# EAGLE board selector_wheel_second_try (EAGLE 7.3.0)
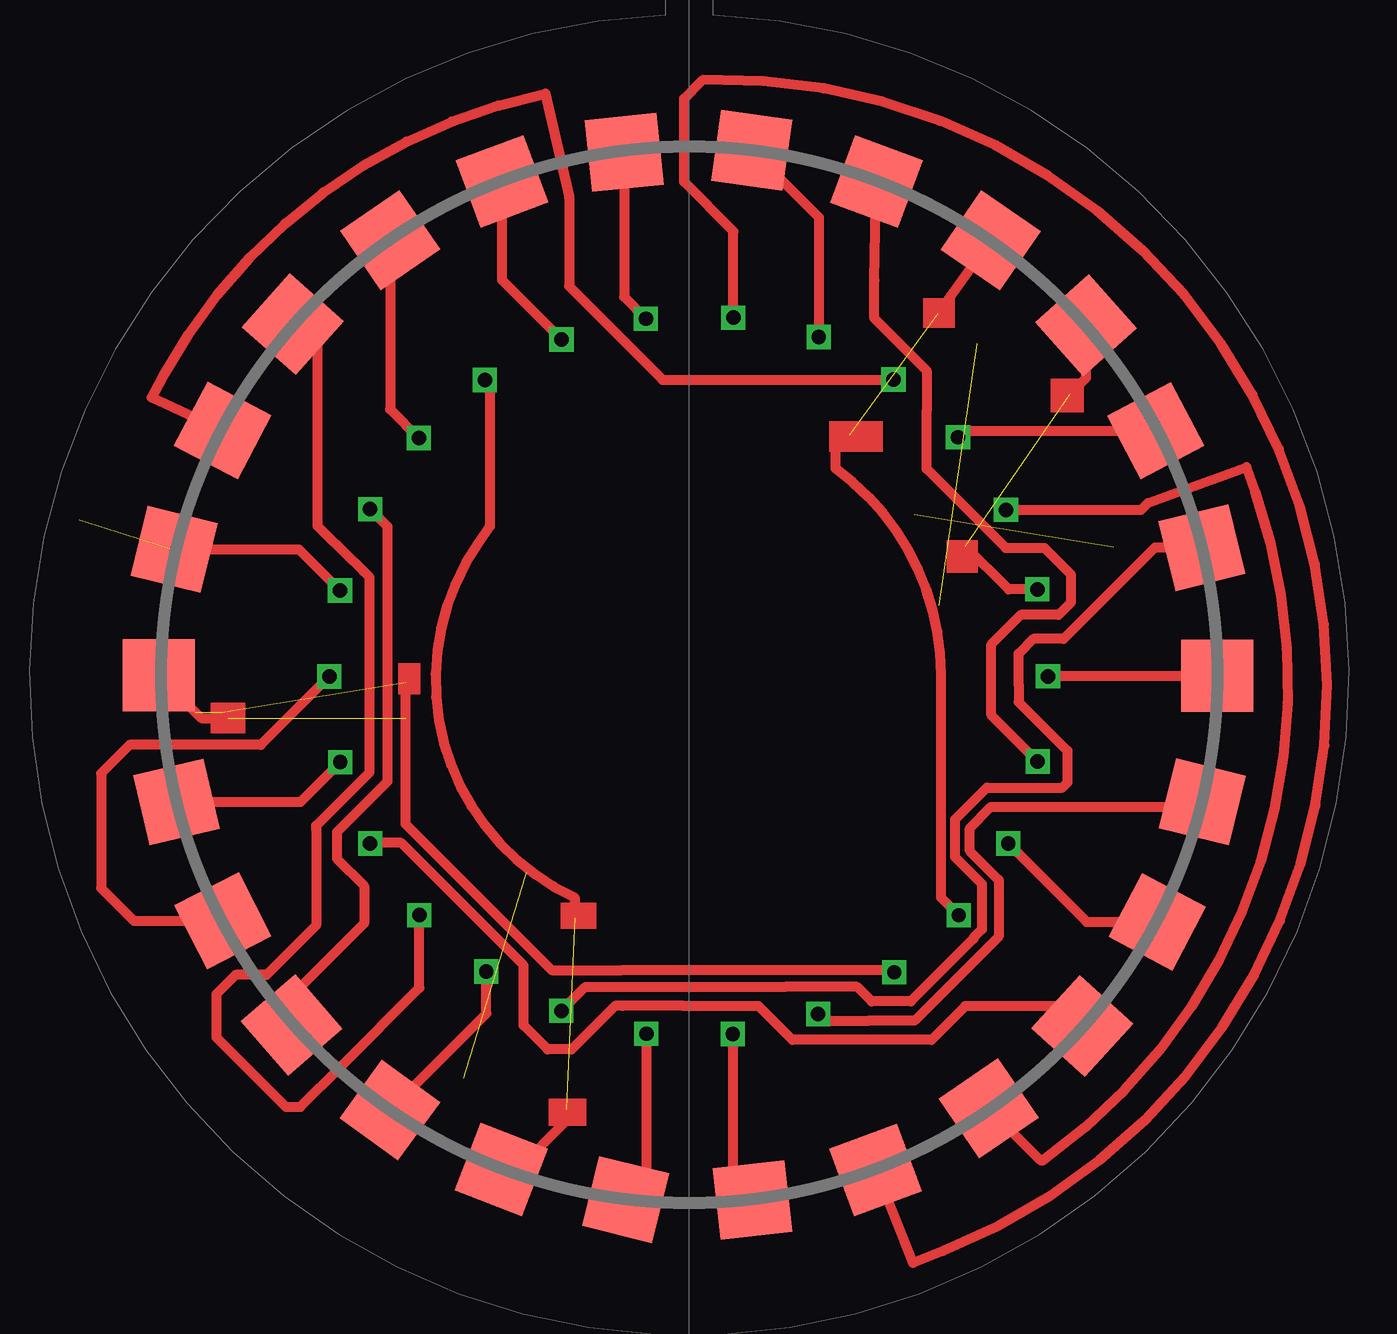
[diagram p0: board, top side]
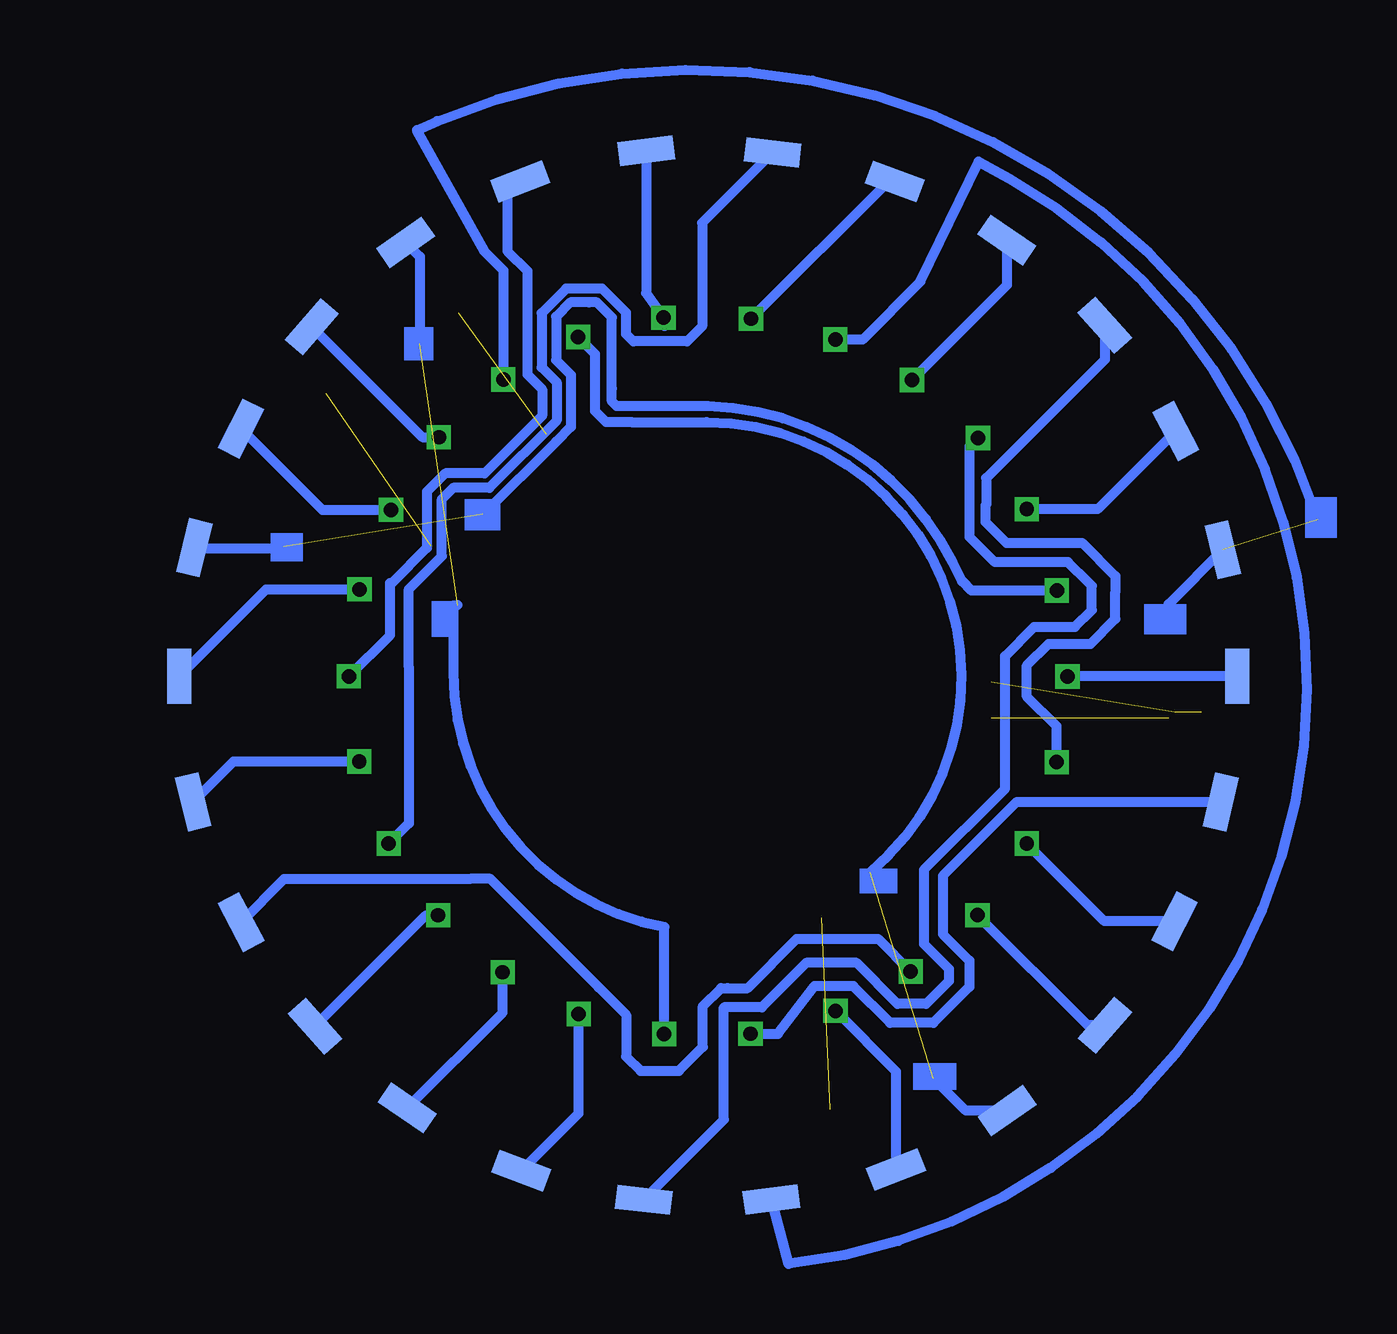
[diagram p1: board, bottom side, seen from below]

No outline drawn. Coordinates in mm, seen from the top.
Copper layers (1*16): Top 0.035mm / dielectric 1.5mm / Bottom 0.035mm
Design rules "default": minimum track width 10mil, minimum drill 24mil, track to track 8mil, track to pad 8mil, pad to pad 8mil, via to via 8mil, smd to smd 8mil, copper to edge 40mil, drill to drill 8mil, minimum pad ring 10mil, minimum via ring 8mil, stop-mask expansion 4mil, vias tented up to drill 0mil, thermal gap 10mil

## Footprints (pad centres in the part's own frame; a part is rotated, then mirrored left to right if it is on the bottom)
CONTACT = smd 3 x 3: P$1 0,0
SPRING = smd 2.3 x 1: P$1 0,0

## Placement (x,y rotation side)
U$1  CONTACT  [CONTACT]  52.01,29.97 0 top
U$2  CONTACT  [CONTACT]  51.36,35.31 103.9 top
U$3  CONTACT  [CONTACT]  49.44,40.18 117.8 top
U$4  CONTACT  [CONTACT]  46.53,44.57 41.7 top
U$5  CONTACT  [CONTACT]  42.56,48.11 145.6 top
U$6  CONTACT  [CONTACT]  37.8,50.56 69.5 top
U$7  CONTACT  [CONTACT]  7.89,29.98 0 top
U$8  CONTACT  [CONTACT]  27.29,51.77 95.9 top
U$9  CONTACT  [CONTACT]  49.51,19.71 332.2 top
U$10  CONTACT  [CONTACT]  51.38,24.71 346.1 top
U$11  CONTACT  [CONTACT]  46.38,15.37 137.6 top
U$12  CONTACT  [CONTACT]  42.48,11.95 304.4 top
U$13  CONTACT  [CONTACT]  32.64,8.13 276.6 top
U$14  CONTACT  [CONTACT]  37.77,9.38 290.5 top
U$15  CONTACT  [CONTACT]  22.17,9.39 248.8 top
U$16  CONTACT  [CONTACT]  27.36,8.14 346.1 top
U$17  CONTACT  [CONTACT]  13.44,15.42 221 top
U$18  CONTACT  [CONTACT]  17.53,11.87 54.2 top
U$19  CONTACT  [CONTACT]  17.54,48.12 304.4 top
U$20  CONTACT  [CONTACT]  22.2,50.57 290.5 top
U$21  CONTACT  [CONTACT]  13.48,44.62 318.3 top
U$22  CONTACT  [CONTACT]  10.56,40.19 332.2 top
U$23  CONTACT  [CONTACT]  8.63,24.71 193.2 top
U$24  CONTACT  [CONTACT]  8.54,35.23 346.1 top
U$25  CONTACT  [CONTACT]  10.57,19.76 207.1 top
U$26  CONTACT  [CONTACT]  32.61,51.86 82 top
U$27  SPRING  [SPRING]  52.02,29.95 90 bottom
U$28  SPRING  [SPRING]  51.39,35.31 76.1 bottom
U$29  SPRING  [SPRING]  49.45,40.27 242.9 bottom
U$30  SPRING  [SPRING]  46.5,44.51 229 bottom
U$31  SPRING  [SPRING]  42.59,48.02 215.1 bottom
U$32  SPRING  [SPRING]  37.81,50.56 201.2 bottom
U$33  SPRING  [SPRING]  7.94,29.94 90 bottom
U$34  SPRING  [SPRING]  27.3,51.77 353.4 bottom
U$35  SPRING  [SPRING]  49.44,19.71 117.8 bottom
U$36  SPRING  [SPRING]  51.45,24.71 103.9 bottom
U$37  SPRING  [SPRING]  46.37,15.36 131.7 bottom
U$38  SPRING  [SPRING]  42.52,11.96 145.6 bottom
U$39  SPRING  [SPRING]  32.67,8.13 173.4 bottom
U$40  SPRING  [SPRING]  37.78,9.34 159.5 bottom
U$41  SPRING  [SPRING]  22.16,9.39 201.2 bottom
U$42  SPRING  [SPRING]  27.35,8.14 187.3 bottom
U$43  SPRING  [SPRING]  13.45,15.41 229 bottom
U$44  SPRING  [SPRING]  17.53,11.85 215.1 bottom
U$45  SPRING  [SPRING]  17.54,48.12 145.6 bottom
U$46  SPRING  [SPRING]  22.21,50.56 159.5 bottom
U$47  SPRING  [SPRING]  13.46,44.57 131.7 bottom
U$48  SPRING  [SPRING]  10.5,40.17 117.8 bottom
U$49  SPRING  [SPRING]  8.62,24.71 256.8 bottom
U$50  SPRING  [SPRING]  8.54,35.22 103.9 bottom
U$51  SPRING  [SPRING]  10.55,19.74 242.9 bottom
U$52  SPRING  [SPRING]  32.57,51.84 187.3 bottom

## Library data of the parts
U$1-U$52 = enigma

## Nets
N$1: U$4.P$1 U$27.P$1
N$2: U$1.P$1 U$32.P$1
N$3: U$25.P$1 U$33.P$1
N$4: U$20.P$1 U$42.P$1
N$5: U$9.P$1 U$34.P$1
N$6: U$11.P$1 U$51.P$1
N$7: U$18.P$1 U$35.P$1
N$8: U$22.P$1 U$50.P$1
N$9: U$13.P$1 U$31.P$1
N$10: U$24.P$1 U$28.P$1
N$11: U$12.P$1 U$29.P$1
N$12: U$3.P$1 U$30.P$1
N$13: U$6.P$1 U$36.P$1
N$14: U$5.P$1 U$37.P$1
N$15: U$7.P$1 U$38.P$1
N$16: U$19.P$1 U$39.P$1
N$17: U$10.P$1 U$40.P$1
N$18: U$2.P$1 U$41.P$1
N$19: U$21.P$1 U$43.P$1
N$20: U$26.P$1 U$44.P$1
N$21: U$15.P$1 U$45.P$1
N$22: U$8.P$1 U$46.P$1
N$23: U$23.P$1 U$47.P$1
N$24: U$17.P$1 U$48.P$1
N$25: U$16.P$1 U$49.P$1
N$26: U$14.P$1 U$52.P$1

## Tracks (layer width: path | path; a pad name or v marks a point on that pad's centre or on a via)
N$1  (via drill 0.6)  (1 unrouted)
  Top 0.406: v44.51,33.57 43.31,33.57 41.52,35.36 | U$4.P$1 46.53,42.37 45.89,41.72
  Bottom 0.406: U$27.P$1 48.4,33.57 v44.51,33.57
N$2  (via drill 0.6)
  Top 0.406: U$1.P$1 51.98,29.94 v44.96,29.94
  Bottom 0.406: U$32.P$1 38.35,50.05 38.35,47.66 37.52,46.84 37.52,42.52 36.9,41.9 36.9,40.8 39.3,38.4 40.94,38.4 41.7,37.64 41.7,35.3 43.17,33.83 43.24,33.83 43.24,31.66 v44.96,29.94
N$3  (via drill 0.6)
  Top 0.406: v15.01,29.94 12.16,27.08 6.68,27.08 5.5,25.9 5.5,21.12 6.87,19.76 U$25.P$1
  Bottom 0.406: U$33.P$1 v15.01,29.94 15.08,29.94
N$4  (via drill 0.6)
  Top 0.406: U$20.P$1 22.2,46.46 v24.68,43.98
  Bottom 0.406: U$42.P$1 26.64,5.46 arc-145 17.46,50.69 18.72,51.39 21.14,46.39 23.55,43.98 v24.68,43.98
N$5  (via drill 0.6)
  Top 0.406: v43.3,22.98 46.57,19.71 U$9.P$1
  Bottom 0.406: U$34.P$1 30.24,48.83 30.24,44.53 30.86,43.9 33.1,43.9 33.4,44.2 33.4,45.1 34.4,46.1 35.9,46.1 36.92,45.08 36.92,42.82 36.3,42.2 36.3,40.6 39.1,37.8 40.61,37.8 41.08,37.33 41.08,34.95 42.46,33.58 42.46,30.32 42.46,23.82 v43.3,22.98
N$6  (via drill 0.6)
  Top 0.406: U$11.P$1 45.55,16.2 41.5,16.2 40.1,14.8 34.3,14.8 32.88,16.21 29.77,16.21 27.22,16.22 26.92,16.22 25.1,14.4 24.1,14.4 23.1,15.4 23.1,17.9 18,23 16.73,23 v16.71,22.98
  Bottom 0.406: U$51.P$1 13.48,19.74 v16.71,22.98
N$7  (via drill 0.6)
  Top 0.406: U$18.P$1 21.55,15.89 v21.55,17.64
  Bottom 0.406: U$35.P$1 47.65,21.5 39.9,21.5 39.06,21.5 34.55,16.98 33.4,15.84 33.4,14.1 32.8,13.5 31.2,13.5 30.2,14.5 30.2,16.2 29.44,16.96 29.18,16.96 28.34,16.96 26.3,19 22.9,19 v21.55,17.64
N$8  (via drill 0.6)  (1 unrouted)
  Top 0.406: U$22.P$1 7.6,41.55 8.09,42.45 arc-50 24.02,54.22 25,49.9 25,46.2 28.9,42.3 38.51,42.3 v38.52,42.31
  Bottom 0.406: 4.59,36.47 arc-94 41.27,53.08 42.12,52.7 39.29,47.63 38.52,46.86 v38.52,42.31 | U$50.P$1 10.8,32.96 10.8,32.4
N$9  (via drill 0.6)  (1 unrouted)
  Top 0.406: v31.82,15.04 31.82,8.95 U$13.P$1
  Bottom 0.406: 31.82,15.48 v31.82,15.04 31.82,19.48 31.8,19.5 arc80 40.6,30.1 40.6,32.89 40.42,32.91 | U$31.P$1 42,47.44 42,43.8
N$10  (via drill 0.6)  (1 unrouted)
  Top 0.406: U$24.P$1 13.74,35.23 v15.45,33.52
  Bottom 0.406: v15.45,33.52 18.01,33.52 19.02,33.52 19.4,33.9 19.8,34.7 arc-62 30,41.2 33.26,41.2 33.8,41.2 34,41.4 34,41.94 34,44.9 34.62,45.52 34.94,45.52 35.73,45.52 36.32,44.93 36.32,43.12 35.7,42.5 35.7,40.34 36.32,39.72 | U$28.P$1 51.38,35.29 47.71,35.29 47.66,35.34 47.66,35.36 | 39.37,36.69 39.35,36.69 36.32,39.72 | 36.32,39.74 36.32,39.72
N$11  (via drill 0.6)
  Top 0.406: v43.2,36.88 48.83,36.88 49.12,37.17 53.22,38.66 53.57,37.66 arc-74 44.74,9.77 44.66,9.77 U$12.P$1
  Bottom 0.406: U$29.P$1 46.06,36.88 v43.2,36.88
N$12  (via drill 0.6)
  Top 0.406: v41.2,39.91 41.47,40.18 U$3.P$1
  Bottom 0.406: U$30.P$1 41.89,39.91 v41.2,39.91
N$13  (via drill 0.6)
  Top 0.406: v44.52,26.39 42.59,28.32 42.59,31.27 43.82,32.5 45.4,32.5 45.9,33 45.9,34.2 44.8,35.3 43.19,35.3 39.9,38.58 39.9,41 39.9,42.68 37.72,44.86 37.72,46.44 U$6.P$1
  Bottom 0.406: v44.52,26.39 49.77,26.39 U$36.P$1
N$14  (via drill 0.6)  (1 unrouted)
  Top 0.406: U$5.P$1 40.38,45.08 | v41.23,19.99 40.5,20.72 40.5,30 arc54 36.1,38.6 36.1,39.4 36.7,40
  Bottom 0.406: U$37.P$1 41.74,19.99 v41.23,19.99
N$15  (via drill 0.6)  (3 unrouted)
  Top 0.406: v38.55,17.62 38.46,17.7 27.2,17.7 24.27,17.7 18.19,23.78 18.19,29.69 18.36,29.87 | U$7.P$1 9.68,28.2 10.8,28.2
  Bottom 0.406: U$38.P$1 38.55,15.94 v38.55,17.62
N$16  (via drill 0.6)
  Top 0.406: U$19.P$1 17.54,41.07 v18.74,39.87
  Bottom 0.406: v18.74,39.87 19.1,39.52 19.1,35.76 18.04,34.7 17.4,34.7 14.99,34.7 14.13,33.84 14,33.71 14,32.7 14.7,32 16.4,32 17.61,30.79 17.61,25.27 21,21.88 21,18.8 19.95,17.75 19.95,17.25 20.9,16.3 22.1,16.3 23.8,18 25.9,18 27.75,16.15 29.33,16.15 29.33,11.47 U$39.P$1
N$17  (via drill 0.6)
  Top 0.406: 51.34,24.76 U$10.P$1 50.91,24.71 50.7,24.5 42.58,24.5 41.7,23.62 41.7,22.66 42.89,21.47 42.9,21.46 42.9,19.1 39.4,15.6 37.5,15.6 35.65,15.6 v35.38,15.88
  Bottom 0.406: 37.77,9.38 U$40.P$1 35.38,11.74 v35.38,15.88
N$18  (via drill 0.6)
  Top 0.406: U$2.P$1 49.41,35.3 45.6,31.5 44.34,31.5 43.73,30.89 43.73,29.61 43.73,28.87 44.7,27.9 45.76,26.84 45.76,25.51 45.55,25.31 42.41,25.31 41.09,23.98 41.09,22.41 42.2,21.3 42.2,19.4 41.85,19.05 41.85,19.01 39.24,16.4 37.6,16.4 37,17 34,17 25.67,17 v24.68,16
  Bottom 0.406: v24.68,16 22.16,13.49 U$41.P$1
N$19  (via drill 0.6)
  Top 0.406: U$21.P$1 14.51,43.67 14.51,36.22 14.81,35.92 16.44,34.32 16.69,34.06 16.69,25.95 14.46,23.73 14.46,23.59 14.46,19.56 12.4,17.5 11.1,17.5 10.3,16.7 10.3,16.2 10.3,14.9 13.2,12 13.8,12 15.5,13.7 18.76,16.96 v18.76,20
  Bottom 0.406: v18.77,20 v18.76,20 14.18,15.41 U$43.P$1
N$20  (via drill 0.6)  (1 unrouted)
  Top 0.406: U$26.P$1 35.4,49.07 v35.4,44.08
  Bottom 0.406: 23.23,21.77 arc-140 30.06,40.54 33.18,40.54 34.24,40.54 34.7,41 34.7,43.38 v35.4,44.08 | U$44.P$1 19.25,11.85 20.6,13.2
N$21  (via drill 0.6)  (1 unrouted)
  Top 0.406: v21.49,42.29 21.7,42.08 21.7,36.19 21.21,35.49 arc100 25.23,20.74 25.23,19.91 25.25,19.88 | U$15.P$1 22.85,9.39 24.9,11.44 24.9,11.9
  Bottom 0.406: U$45.P$1 17.54,46.25 v21.49,42.29
N$22  (via drill 0.6)
  Top 0.406: U$8.P$1 27.29,45.75 v28.2,44.84
  Bottom 0.406: U$46.P$1 22.48,50.56 v28.2,44.84
N$23  (via drill 0.6)
  Top 0.406: v15.47,26.37 13.8,24.71 U$23.P$1
  Bottom 0.406: v15.47,26.37 15.47,27.87 16.7,29.1 16.7,30.4 15.8,31.3 14.05,31.3 13.02,32.34 13.02,33.47 13.02,34.12 14.4,35.5 17.56,35.5 18.42,36.37 18.42,37.05 18.4,37.08 18.4,38.2 13.46,43.14 U$47.P$1
N$24  (via drill 0.6)
  Top 0.406: U$17.P$1 12.93,15.92 12.93,16.13 16.46,19.65 16.46,21.21 15.32,22.35 15.32,23.45 17.44,25.57 17.44,36.18 v16.71,36.91
  Bottom 0.406: U$48.P$1 13.75,36.91 v16.71,36.91
N$25  (via drill 0.6)
  Top 0.406: v28.22,15.05 28.22,9 U$16.P$1
  Bottom 0.406: v28.22,15.05 27.08,15.04 25.55,17.04 23.94,17.04 22.4,15.5 20.6,15.5 19.1,17 19.1,18.1 20.2,19.2 20.2,21.63 17.12,24.71 U$49.P$1
N$26  (via drill 0.6)
  Top 0.406: U$14.P$1 39.32,5.51 40.57,6 arc160 30.58,54.8 29.79,54.01 29.79,50.55 31.84,48.49 v31.84,44.89
  Bottom 0.406: 31.81,44.54 v31.84,44.89 32.57,45.91 U$52.P$1
(copper drawn outside any net)
  shapes: Bottom area x8, Top area x8